# Altium PCB MAKKI_ISMAIL_ESPS3_CAM.PcbDoc
Units mil, origin at the board's own origin, x right, y up, seen from the top; angles counter-clockwise.
Board outline 2453.02 x 2250 mil, 2 copper layers (Top, Bottom); 77 components, 63 nets, 296 pads, 133 vias.
Unrouted connection lines stored in the file: 21.
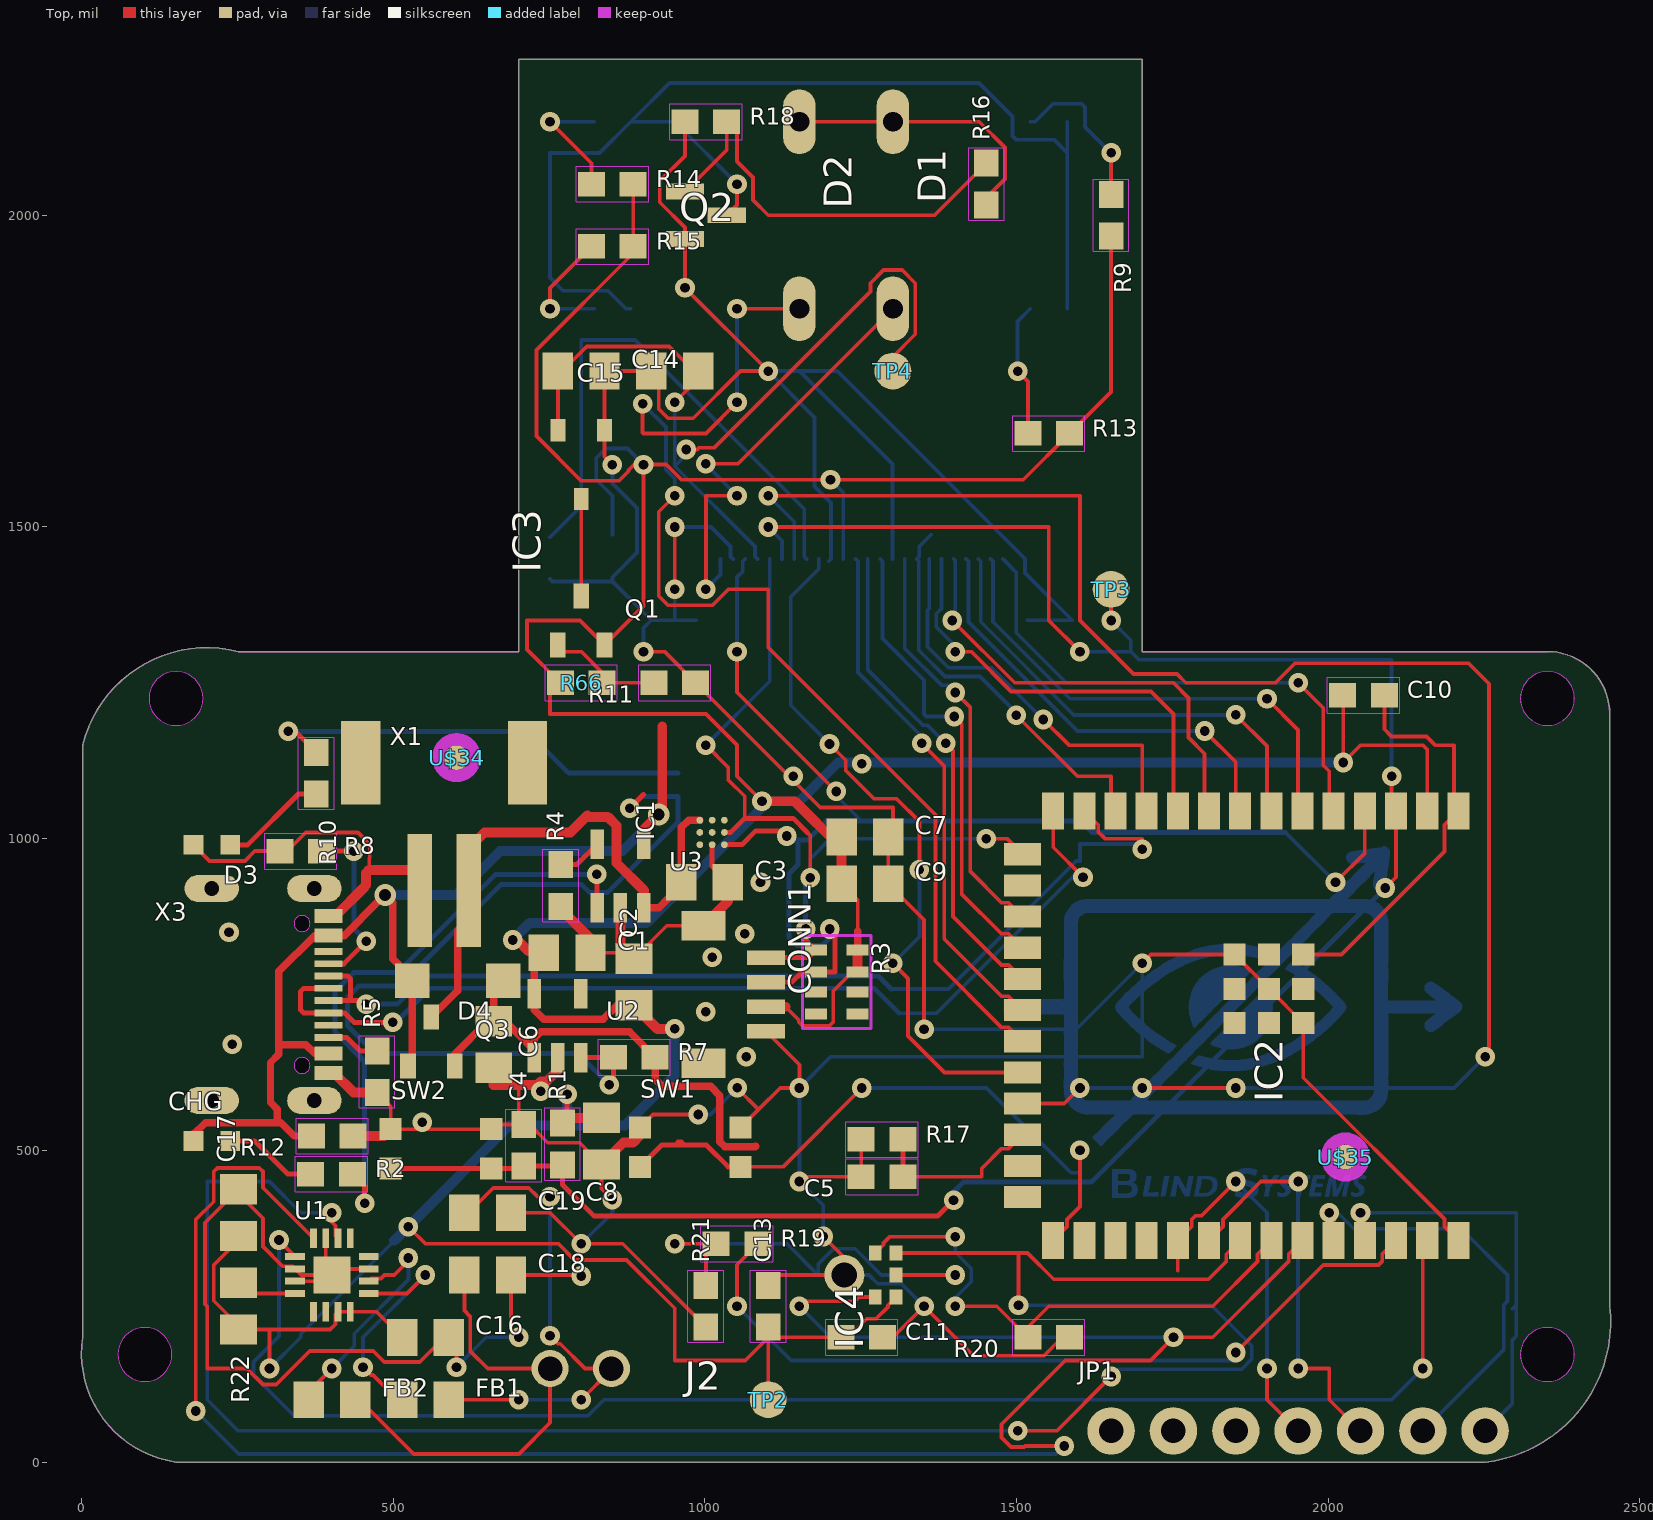
[diagram p0: Top view]
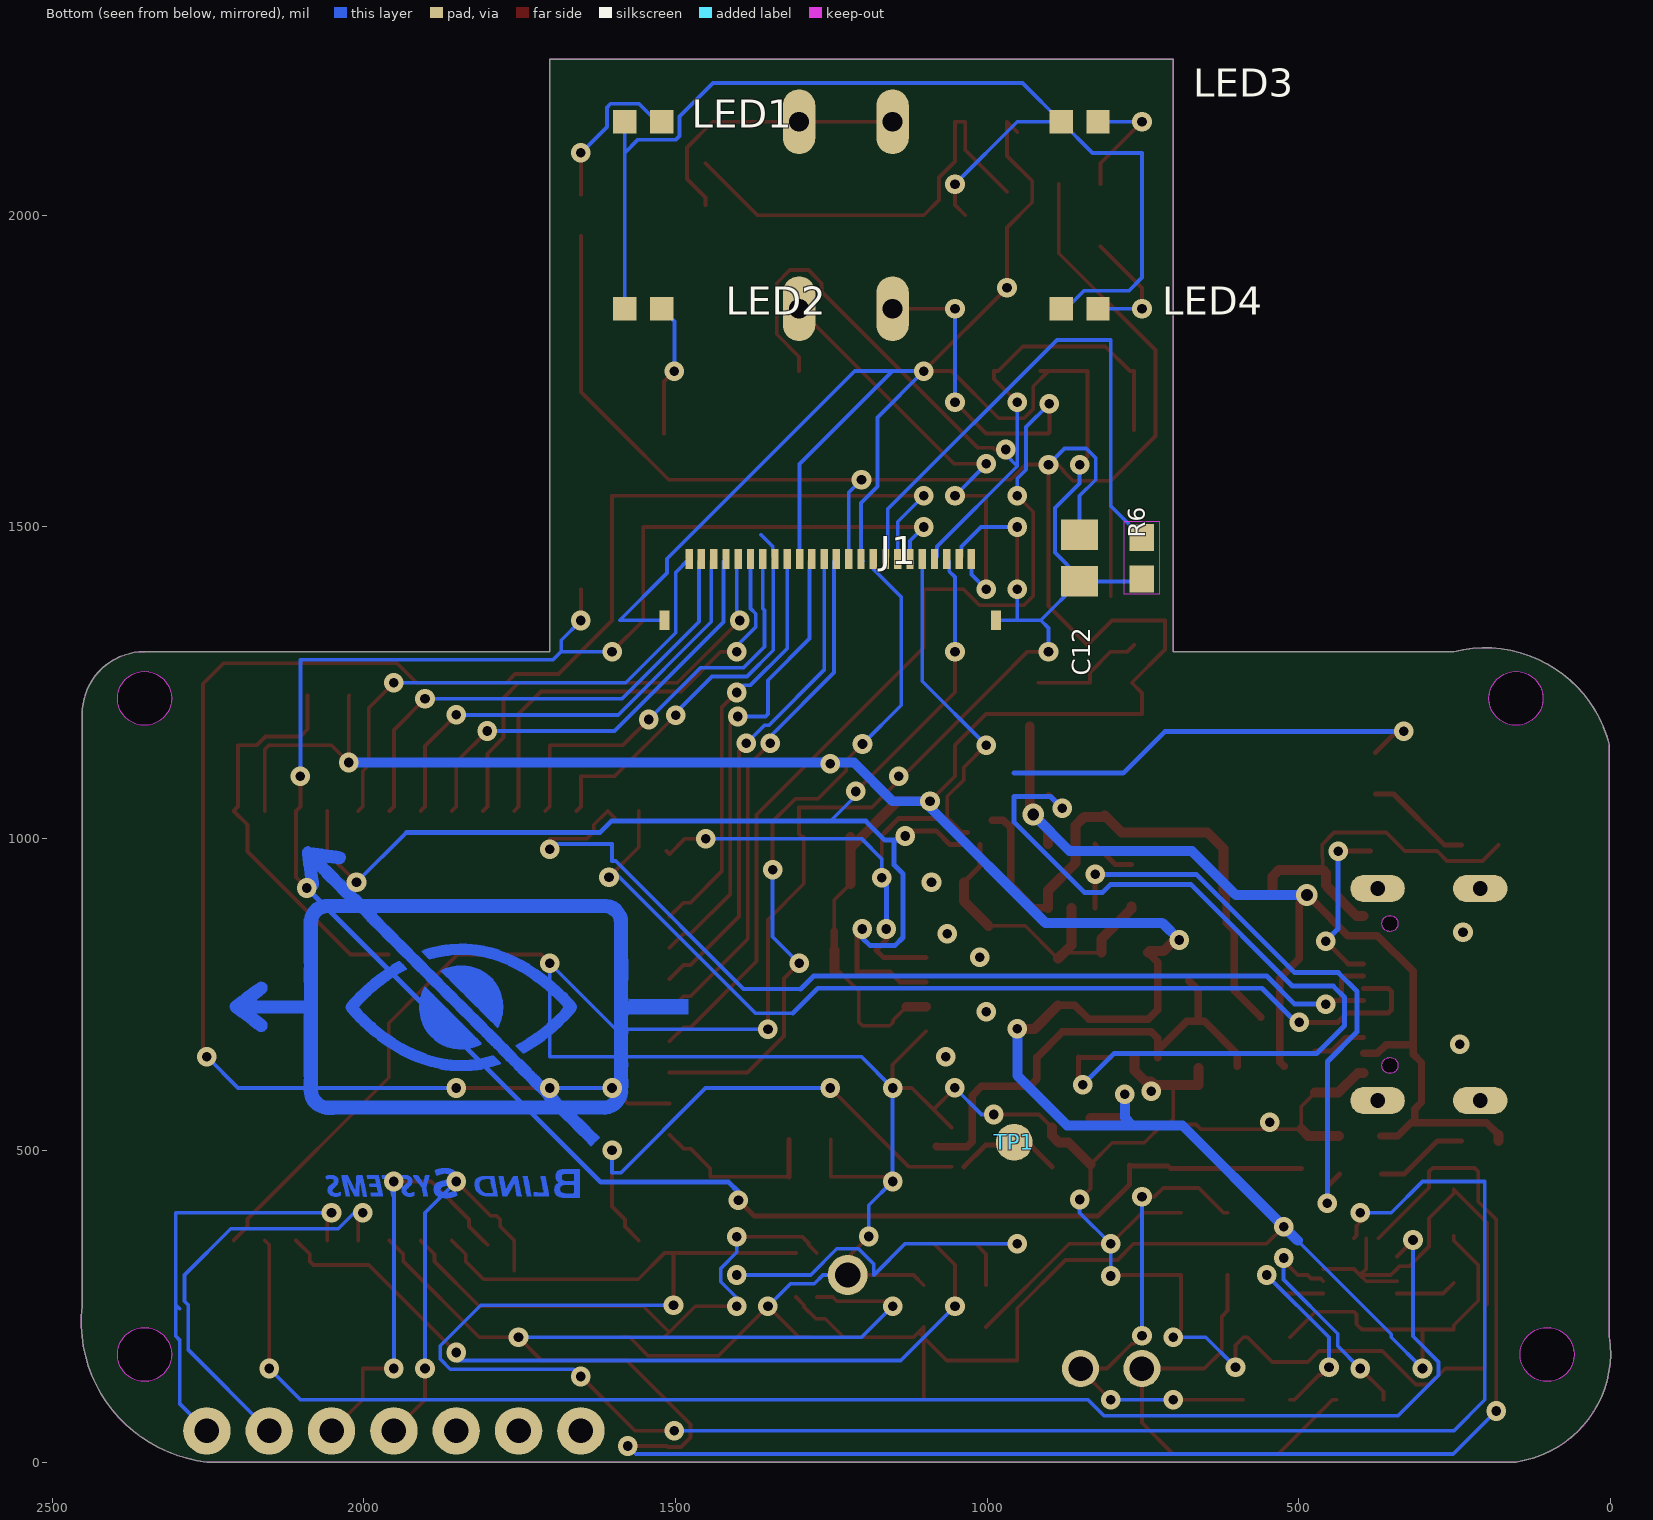
[diagram p1: Bottom view, seen from below]

## Layer stack, top to bottom
Top Solder: solder mask 0.4, Solder Resist, Dk 3.5
Top: signal copper 1.378
Dielectric 1: dielectric 12.6, FR-4, Dk 4.8
Bottom: signal copper 1.378
Bottom Solder: solder mask 0.4, Solder Resist, Dk 3.5

## Board outline
1701.78,2250 1701.78,1300 2351.78,1300 cw(c2351.78,1200) 2451.78,1200 2451.78,250 cw(c2226.78,225) 2251.78,0 151.78,0 cw(c176.78,175) 1.78,200 1.78,1150 cw(c201.78,1100) 251.78,1300 701.78,1300 701.78,2250
cut-out: 101.78,129.19 ccw(c101.78,172.5) 145.08,172.5 ccw(c101.78,172.5) 101.78,215.81 ccw(c101.78,172.5) 58.47,172.5 ccw(c101.78,172.5)
cut-out: 151.78,1181.69 ccw(c151.78,1225) 195.08,1225 ccw(c151.78,1225) 151.78,1268.31 ccw(c151.78,1225) 108.47,1225 ccw(c151.78,1225)
cut-out: 2351.78,129.19 ccw(c2351.78,172.5) 2395.08,172.5 ccw(c2351.78,172.5) 2351.78,215.81 ccw(c2351.78,172.5) 2308.47,172.5 ccw(c2351.78,172.5)
cut-out: 2351.78,1181.69 ccw(c2351.78,1225) 2395.08,1225 ccw(c2351.78,1225) 2351.78,1268.31 ccw(c2351.78,1225) 2308.47,1225 ccw(c2351.78,1225)
cut-out: 354.02,850.99 ccw(c354.02,863.78) 366.81,863.78 ccw(c354.02,863.78) 354.02,876.58 ccw(c354.02,863.78) 341.22,863.78 ccw(c354.02,863.78)
cut-out: 354.02,623.42 ccw(c354.02,636.22) 366.81,636.22 ccw(c354.02,636.22) 354.02,649.01 ccw(c354.02,636.22) 341.22,636.22 ccw(c354.02,636.22)

## Design rules (kind name [scope] priority, off if disabled: settings)
BoardOutlineClearance mdCopperDimension [All] p1: gap=10 ignorepadtopadclearanceinfootprint=FALSE except(0: Arc-SplitContinuation Track-SplitContinuation SMDPad-SplitContinuation THPad-SplitContinuation Via-SplitContinuation Fill-SplitContinuation Poly-SplitContinuation Region-SplitContinuation Text-SplitContinuation)
Clearance "Clearance (Same Net)" [All] p1: gap=8 ignorepadtopadclearanceinfootprint=FALSE except(7: SMDPad-SMDPad SMDPad-THPad SMDPad-Via)
Clearance [All] p2: gap=8 ignorepadtopadclearanceinfootprint=FALSE except(7: Track-THPad Track-Via THPad-THPad THPad-Via Via-Via)
HoleSize HoleSize_For_NetClass_Power [InNetClass('Power')] p1: absolutevalues=TRUE maxlimit=19 minlimit=19 maxpercent=80.000 minpercent=20.000
HoleSize HoleSize_For_NetClass_gnd [InNetClass('gnd')] p2: absolutevalues=TRUE maxlimit=19 minlimit=19 maxpercent=80.000 minpercent=20.000
HoleSize [All] p3: absolutevalues=TRUE maxlimit=100000 minlimit=15.5 maxpercent=80.000 minpercent=20.000
HoleToHoleClearance mdDrill [All] p1: gap=8 allowstackedmicrovias=TRUE
MinimumSolderMaskSliver [All] p1 off: minsoldermaskwidth=10
PasteMaskExpansion Expansion_SMDPaste_OFF [InPadClass('SMDPaste_OFF')] p1: expansion=0
PasteMaskExpansion mlMinCreamFrame [All] p2: expansion=0
PolygonConnect ThermalVias [IsVia] p1: connectstyle=Direct reliefconductorwidth=10 reliefentries=4 polygonreliefangle="90 Angle" airgapwidth=10
PolygonConnect [All] p2: connectstyle=Relief reliefconductorwidth=10 reliefentries=4 polygonreliefangle="90 Angle" airgapwidth=10
RoutingVias [All] p1: holewidth=15.5 width=31.5 viastyle="Through Hole" minholewidth=15.5 minwidth=31.5 maxholewidth=100 maxwidth=100
SolderMaskExpansion Expansion_SMDSolder_OFF [InPadClass('SMDSolder_OFF')] p1: expansion=0 istentingtop=FALSE
SolderMaskExpansion mlMinStopFrame [All] p2: expansion=2 istentingtop=FALSE
Width Width_For_NetClass_Power [InNetClass('Power')] p1: maxlimit=24 minlimit=10 preferedwidth=12
Width Width_For_NetClass_gnd [InNetClass('gnd')] p2: maxlimit=10 minlimit=10 preferedwidth=10
Width [All] p3: maxlimit=10 minlimit=6 preferedwidth=6
26 further rules are at their usual default settings.

## Classes and differential pairs
pad class SMDSolder_OFF: U1-1 U1-2 U1-3 U1-4 U1-5 U1-6 U1-7 U1-8 U1-9 U1-10 U1-11 U1-12 U1-13 U1-14 U1-15 U1-16
pad class SMDPaste_OFF: TP1-P$1 TP2-P$1 TP3-P$1 TP4-P$1 U1-THERMAL U$34-1 U$35-1
net class Power: VBAT VBUS VHI

## Components (designator, comment, footprint, x,y, rotation, side; value= is the part's Value field where it differs from the comment)
C1 "10uF" 0805-NO 779.28,817 r0 top
C2 "10uF" 0805-NO 886.28,770 r90 top
C3 "10µF" 0805-NO 999.78,930 r0 top
C4 "1uF" 0603-NO 709.78,508 r90 top
C5 "1uF" 0603-NO 1284.28,457.5 r180 top
C6 "10µF" 0805-NO 661.35,669.8 r270 top
C7 "10uF" 0805-NO 1256.78,1002.5 r0 top
C8 "10µF" 0805-NO 834.37,514.64 r270 top
C9 "10uF" 0805-NO 1256.78,927.5 r0 top
C10 "1uF" 0603-NO 2056.78,1230 r0 top
C11 "0.1uF" 0603-NO 1251.78,200 r0 top
C12 "100pF" 0805-NO 851.78,1450 r270 bottom
C13 "1uF" 0603-NO 1101.78,250 r90 top
C14 "10µF" 0805-NO 801.78,1750 r0 top
C15 "100pF" 0805-NO 951.78,1750 r180 top
C16 "0.1uF" 0805-NO 551.78,200 r0 top
C17 "10uF" 0805-NO 251.78,400 r90 top
C18 "220pF" 0805-NO 651.78,300 r0 top
C19 "220pF" 0805-NO 651.78,400 r0 top
CHG "ORANGE" CHIPLED_0603_NOOUTLINE 209.28,515 r270 top
CONN1 "JST SH" JST_SH4_RA 1031.78,750 r270 top
D1 "1N4148DO35-7" DO35-7 1301.78,2000 r270 top
D2 "1N4148DO35-7" DO35-7 1151.78,2000 r270 top
D3 "RED" CHIPLED_0603_NOOUTLINE 209.28,990 r90 top
D4 "MBR540" SOD-123 603.78,772 r180 top
FB1 "Ferrite" 0805-NO 551.78,100 r0 top
FB2 "Ferrite" 0805-NO 401.78,100 r0 top
IC1 "LC709203F/MH" WLCSP9 1011.78,1010 r90 top
IC2 "ESP32-S3-WROOM-1-N16R8" ESP32S3WROOM1N16R8 2001.78,700 r270 top
IC3 "XC6206P282MR-G" SOT95P280X130-3N 801.78,1600 r270 top
IC4 "" SPH0645LM4H 1251.78,300 r270 top
J1 "2-2328702-4" 223287024 1251.78,1400 r180 bottom
J2 "B2B-XH-A" B2B-XH-A 751.78,150 r0 top
JP1 "" 1X07_ROUND_76 1951.78,50 r0 top
LED1 "150060SS75000" LEDC1608X80N 1551.78,2150 r180 bottom
LED2 "150060SS75000" LEDC1608X80N 1551.78,1850 r180 bottom
LED3 "150060SS75000" LEDC1608X80N 851.78,2150 r180 bottom
LED4 "150060SS75000" LEDC1608X80N 851.78,1850 r180 bottom
Q1 "DMG3415U" SOT23-R 801.78,1350 r0 top
Q2 "2N7002" SOT96P240X120-3N 1001.78,2000 r0 top
Q3 "DMG3415U" SOT23-R 561.28,674.5 r0 top
R1 "5.1K" 0603-NO 771.78,510 r90 top
R2 "5.1K" 0603-NO 401.28,462 r0 top
R3 "10K" RESPACK_4X0603 1211.78,770 r270 top
R4 "5.1K" 0603-NO 768.78,925 r90 top
R5 "5.1K" 0603-NO 474.28,626 r90 top
R6 "1K" 0603-NO 751.78,1450 r90 bottom
R7 "100K" 0603-NO 886.78,649.5 r0 top
R8 "5.1K" 0603-NO 351.78,980 r0 top
R9 "0.12 K" 0603-NO 1651.78,2000 r270 top
R10 "5.1K" 0603-NO 376.78,1105 r270 top
R11 "1K" 0603-NO 951.78,1250 r180 top
R12 "100K" 0603-NO 402.28,523 r180 top
R13 "0.12 K" 0603-NO 1551.78,1650 r0 top
R14 "0.12 K" 0603-NO 851.78,2050 r0 top
R15 "0.12 K" 0603-NO 851.78,1950 r0 top
R16 "1K" 0603-NO 1451.78,2050 r90 top
R17 "1Meg" 0603-NO 1284.28,517.5 r0 top
R18 "1K" 0603-NO 1001.78,2150 r0 top
R19 "68" 0603-NO 1051.78,350 r0 top
R20 "47K" 0603-NO 1551.78,200 r180 top
R21 "47K" 0603-NO 1001.78,250 r90 top
R22 "1M" 0805-NO 251.78,250 r270 top
R66 "10K" 0603-NO 801.78,1250 r180 top
SW1 "KMR2" BTN_KMR2_4.6X2.8 976.78,505 r0 top
SW2 "KMR2" BTN_KMR2_4.6X2.8 576.78,502.5 r0 top
TP1 "" TESTPOINT_ROUND_1.5MM_NO 956.78,513 r180 bottom
TP2 "" TESTPOINT_ROUND_1.5MM_NO 1101.78,100 r0 top
TP3 "" TESTPOINT_ROUND_1.5MM_NO 1651.78,1400 r0 top
TP4 "" TESTPOINT_ROUND_1.5MM_NO 1301.78,1750 r0 top
U1 "MAX98357A" QFN16_3MM 401.78,300 r0 top
U2 "AP2112/RT9080-3.3" SOT23-5 763.78,700 r0 top
U3 "MCP73831T-2ACI/OT" SOT23-5 864.78,940 r0 top
U$34 "" FIDUCIAL_1MM 601.78,1130 r270 top
U$35 "" FIDUCIAL_1MM 2027.64,489.28 r270 top
X1 "JSTPH" JSTPH2_BATT 581.78,1062.5 r0 top
X3 "USB C" USB_C_CUSB31-CFM2AX-01-X 256.78,750 r270 top

## Footprints (in the part's own frame and the unit in brackets; to place one, negate y for a bottom-side part, rotate by r counter-clockwise, add the part's x,y. Pads: shape width x height; smd on the part's side, far side on the other; paste and mask are expansions set on the pad)
1X07_ROUND_76 [mil] "1X07_ROUND_76"
  round 76 hole 39.37: 1(-300,0) 2(-200,0) 3(-100,0) 4(0,0) 5(100,0) 6(200,0) 7(300,0)
  body extent -354,-38 338,38, height 150
0603-NO [mm] "0603-NO"
  rect 1.1x1 smd: 1(-0.85,0) 2(0.85,0)
  Top keep-out lines w0.051: -1.473,0.729 -1.473,-0.729 1.473,-0.729 1.473,0.729 -1.473,0.729
  body extent -1.5,-0.76 1.5,0.76, height 3.81
0805-NO [mil] "0805-NO"
  rect 48.82x59.06 smd: 1(-37.4,0) 2(37.4,0)
  body extent -62,-30 62,30, height 150
223287024 [mil] "223287024"
  rect 11.81x31.5 smd: 1(226.38,48.62) 2(206.69,48.62) 3(187.01,48.62) 4(167.32,48.62) 5(147.64,48.62) 6(127.95,48.62) 7(108.27,48.62) 8(88.58,48.62) 9(68.9,48.62) 10(49.21,48.62) 11(29.53,48.62) 12(9.84,48.62) 13(-9.84,48.62) 14(-29.53,48.62) 15(-49.21,48.62) 16(-68.9,48.62) 17(-88.58,48.62) 18(-108.27,48.62) 19(-127.95,48.62) 20(-147.64,48.62) 21(-167.32,48.62) 22(-187.01,48.62) 23(-206.69,48.62) 24(-226.38,48.62)
  rect 15.75x31.5 smd: 25(-265.75,-49.8) 26(265.75,-49.8)
  body extent -274,-66 274,64, height 50
B2B-XH-A [mm] "B2B-XH-A"
  round 1.508 hole 1: 1(0,0) 2(2.5,0)
  body extent -0.76,-0.76 3.26,0.76, height 1.27
BTN_KMR2_4.6X2.8 [mil] "BTN_KMR2_4.6X2.8"
  rect 35.43x35.43 smd: A(80.71,31.5) A'(-80.71,31.5) B(80.71,-31.5) B'(-80.71,-31.5)
  body extent -98,-59 98,59, height 150
CHIPLED_0603_NOOUTLINE [mil] "CHIPLED_0603_NOOUTLINE"
  rect 31.5x31.5 smd: A(0,-29.53) C(0,29.53)
  body extent -18,-45 18,45, height 150
DO35-7 [mil] "DO35-7"
  oval 104x52 hole 32: A(150,0) C(-150,0)
  body extent -202,-26 202,26, height 150
ESP32S3WROOM1N16R8 [mm] "ESP32S3WROOM1N16R8"
  rect 1.5x0.9 smd: 1(-8.75,5.26) 2(-8.75,3.99) 3(-8.75,2.72) 4(-8.75,1.45) 5(-8.75,0.18) 6(-8.75,-1.09) 7(-8.75,-2.36) 8(-8.75,-3.63) 9(-8.75,-4.9) 10(-8.75,-6.17) 11(-8.75,-7.44) 12(-8.75,-8.71) 13(-8.75,-9.98) 14(-8.75,-11.25) 27(8.75,-11.25) 28(8.75,-9.98) 29(8.75,-8.71) 30(8.75,-7.44) 31(8.75,-6.17) 32(8.75,-4.9) 33(8.75,-3.63) 34(8.75,-2.36) 35(8.75,-1.09) 36(8.75,0.18) 37(8.75,1.45) 38(8.75,2.72) 39(8.75,3.99) 40(8.75,5.26)
  rect 0.9x1.5 smd: 15(-6.985,-12.5) 16(-5.715,-12.5) 17(-4.445,-12.5) 18(-3.175,-12.5) 19(-1.905,-12.5) 20(-0.635,-12.5) 21(0.635,-12.5) 22(1.905,-12.5) 23(3.175,-12.5) 24(4.445,-12.5) 25(5.715,-12.5) 26(6.985,-12.5)
  rect 0.9x0.9 smd: 41(-1.5,-2.46) 42(-2.9,-1.06) 43(-2.9,-2.46) 44(-2.9,-3.86) 45(-1.5,-3.86) 46(-0.1,-3.86) 47(-0.1,-2.46) 48(-0.1,-1.06) 49(-1.5,-1.06)
  body extent -10.55,-14.3 10.55,13.8, height 3.81
FIDUCIAL_1MM [mm] "FIDUCIAL_1MM"
  rrect100% 1x1 smd paste+0: 1(0,0)
  Top keep-out lines w0.483: 0,-0.75 cw(c0,0) -0.75,0 cw(c0,0) 0,0.75 cw(c0,0) 0.75,0 cw(c0,0) 0,-0.75
  Top keep-out lines w0.5: 0,-0.75 cw(c0,0) -0.75,0 cw(c0,0) 0,0.75 cw(c0,0) 0.75,0 cw(c0,0) 0,-0.75
  body extent -1.01,-1.01 1.01,1.01, height 3.81
JST_SH4_RA [mil] "JST_SH4_RA"
  rect 23.62x61.02 smd: 1(59.06,66.38) 2(19.69,66.38) 3(-19.69,66.38) 4(-59.06,66.38)
  rect 47.24x70.87 smd: MT1(-110.24,-33.94) MT2(110.24,-33.94)
  body extent -134,-69 134,97, height 150
JSTPH2_BATT [mm] "JSTPH2_BATT"
  rect 1x4.6 smd: 1(-1,-3.7) 2(1,-3.7)
  rect 1.6x3.4 smd: NC1(-3.4,1.5) NC2(3.4,1.5)
  body extent -4.2,-6 4.2,3.2, height 3.81
LEDC1608X80N [mil] "LEDC1608X80N"
  rect 37.4x37.4 smd: 1(-29.53,0) 2(29.53,0)
  body extent -48,-19 48,19, height 50
QFN16_3MM [mil] "QFN16_3MM"
  rect 31.5x11.02 smd mask+0: 1(-59.06,29.53) 2(-59.06,9.84) 3(-59.06,-9.84) 4(-59.06,-29.53) 9(59.06,-29.53) 10(59.06,-9.84) 11(59.06,9.84) 12(59.06,29.53)
  rect 11.02x31.5 smd mask+0: 5(-29.53,-59.06) 6(-9.84,-59.06) 7(9.84,-59.06) 8(29.53,-59.06) 13(29.53,59.06) 14(9.84,59.06) 15(-9.84,59.06) 16(-29.53,59.06)
  rect 59.06x59.06 smd paste+0: THERMAL(0,0)
  body extent -76,-76 76,76, height 150
RESPACK_4X0603 [mil] "RESPACK_4X0603"
  rect 17.72x35.43 smd: 1(-51.18,-33.46) 2(-15.75,-33.46) 3(15.75,-33.46) 4(51.18,-33.46) 5(51.18,33.46) 6(15.75,33.46) 7(-15.75,33.46) 8(-51.18,33.46)
  Top keep-out lines w5: 74.8,-55.12 -74.8,-55.12 -74.8,55.12 74.8,55.12 74.8,-55.12
  body extent -78,-58 78,58, height 150
SOD-123 [mil] "SOD-123"
  rect 55.12x55.12 smd: A(72.83,0) C(-72.83,0)
  body extent -100,-32 100,32, height 150
SOT23-5 [mil] "SOT23-5"
  rect 21.65x47.24 smd: 1(-37.4,-51.19) 2(0,-51.19) 3(37.4,-51.19) 4(37.4,51.19) 5(-37.4,51.19)
  body extent -60,-75 60,75, height 150
SOT23-R [mil] "SOT23-R"
  rect 25x40 smd: 1(-37.4,-39.37) 2(37.4,-39.37) 3(0,39.37)
  body extent -66,-59 66,59, height 150
SOT95P280X130-3N [mil] "SOT95P280X130-3N"
  rect 35.43x23.62 smd: 1(-55.12,37.4) 2(-55.12,-37.4) 3(55.12,0)
  body extent -84,-72 84,72, height 150
SOT96P240X120-3N [mm] "SOT96P240X120-3N"
  rect 1.55x0.65 smd: 1(-0.85,0.96) 2(-0.85,-0.96) 3(0.85,0)
  body extent -1.9,-1.78 1.9,1.78, height 3.81
SPH0645LM4H [mm] "SPH0645LM4H"
  rect 0.6x0.525 smd: 1(-0.9,1.4) 2(-0.9,0.55) 4(0.9,0.55) 5(0.9,1.4) 6(0,1.4)
  round 1.625 hole 1.025: 3(0,-0.71)
  body extent -1.2,-1.53 1.2,1.66, height 3.81
TESTPOINT_ROUND_1.5MM_NO [mil] "TESTPOINT_ROUND_1.5MM_NO"
  rrect100% 59.06x59.06 smd paste+0: P$1(0,0)
  body extent -30,-30 30,30, height 50
USB_C_CUSB31-CFM2AX-01-X [mil] "USB_C_CUSB31-CFM2AX-01-X"
  rect 22.64x45.28 smd: A1B12(-125.98,139.57) A4B9(-94.49,139.57) B1A12(125.98,139.57) B4A9(94.49,139.57)
  rect 10.83x45.28 smd: A5(-49.21,139.57) A6(-9.84,139.57) A7(9.84,139.57) A8(49.21,139.57) B5(68.9,139.57) B6(29.53,139.57) B7(-29.53,139.57) B8(-68.9,139.57)
  oval 43.62x87.24 hole 23.62: M1(-170.08,116.93) M2(170.08,116.93) M3(-170.08,-47.64) M4(170.08,-47.64)
  body extent -192,-151 192,162, height 150
WLCSP9 [mil] "WLCSP9"
  rrect100% 10.83x10.83 smd: A1(-19.69,19.69) A2(0,19.69) A3(19.69,19.69) B1(-19.69,0) B2(0,0) B3(19.69,0) C1(-19.69,-19.69) C2(0,-19.69) C3(19.69,-19.69)
  body extent -26,-26 26,26, height 50

## Part data
C1 C2 C3 C6 C7 C8 C9 C12 C14 C15 C16 C17 C18 C19 FB1 FB2 R22: library part 0805-NO, PackageName=0805-NO
C4 C5 C10 C11 C13 R1 R2 R4 R5 R6 R7 R8 R9 R10 R11 R12 R13 R14 R15 R16 R17 R18 R19 R20 R21 R66: library part 0603-NO, PackageName=0603-NO
CHG D3: library part CHIPLED_0603_NOOUTLINE, PackageName=CHIPLED_0603_NOOUTLINE
CONN1: library part JST_SH4_RA, PackageName=JST_SH4_RA
D1 D2: library part DO35-7, PackageName=DO35-7
D4: library part SOD-123, PackageName=SOD-123
IC1: library part WLCSP9, PackageName=WLCSP9
IC2: library part ESP32S3WROOM1N16R8, PackageName=ESP32S3WROOM1N16R8
IC3: library part SOT95P280X130-3N, PackageName=SOT95P280X130-3N
IC4: library part SPH0645LM4H, PackageName=SPH0645LM4H
J1: library part 223287024, PackageName=223287024
JP1: library part 1X07_ROUND_76, PackageName=1X07_ROUND_76
LED1 LED2 LED3 LED4: library part LEDC1608X80N, PackageName=LEDC1608X80N
Q1 Q3: library part SOT23-R, PackageName=SOT23-R
Q2: library part SOT96P240X120-3N, PackageName=SOT96P240X120-3N
R3: library part RESPACK_4X0603, PackageName=RESPACK_4X0603
SW1 SW2: library part BTN_KMR2_4.6X2.8, PackageName=BTN_KMR2_4.6X2.8
TP1 TP2 TP3 TP4: library part TESTPOINT_ROUND_1.5MM_NO, PackageName=TESTPOINT_ROUND_1.5MM_NO
U1: library part QFN16_3MM, PackageName=QFN16_3MM
U2 U3: library part SOT23-5, PackageName=SOT23-5
U$34 U$35: library part FIDUCIAL_1MM, PackageName=FIDUCIAL_1MM
X1: library part JSTPH2_BATT, PackageName=JSTPH2_BATT
X3: library part USB_C_CUSB31-CFM2AX-01-X, PackageName=USB_C_CUSB31-CFM2AX-01-X
J2: PackageName=B2B-XH-A

## Free pads (board coordinates)
  round 25.59 hole 25.59 unplated: MH1(354.02,636.22) MH2(354.02,863.78)
  round 86.61 hole 86.61 unplated: MH1(2351.78,172.5) MH2(2351.78,1225) MH3(101.78,172.5) MH4(151.78,1225)

## Via types
v1: diameter 31.5/31.5 (per signal layer), hole 15.5, Top to Bottom, 131 vias
v2: diameter 35/35 (per signal layer), hole 19, Top to Bottom, 2 vias

## Nets (pads, with @x,y where several pads share a name; then routed paths per layer and width w, separated by ;. In a path a pad name is that pad's centre, name@x,y a point inside that pad or via, vN(x,y) a via of type N, cw(c..) or ccw(c..) an arc to the next point about the centre after c; other vN are vias at no path point)
1.8V: IC2.25
2.8V: C14.1 C15.1 IC3.2 J1.4 TP4.P$1 | length 1417.9
  Top w6: IC3.2 C14.1 771.1,1750 810.63,1789.53 942.93,1789.53 982.46,1750 C15.1 989.18,1737.4 v1(951.78,1700) ; v1(970.08,1624.25) 988.11,1624.25 991.11,1627.25 1015.45,1627.25 1265.78,1877.58 1265.78,1890.91 1286.87,1912 1316.69,1912 1337.78,1890.91 1337.78,1809.09 1301.78,1773.09 TP4.P$1
  Bottom w6: v1(951.78,1700) 951.78,1597.41 ; v1(970.08,1624.25) 970.08,1615.71 951.78,1597.41 ; J1.4 1080.68,1452.4 1080.68,1468.51 951.78,1597.41
3.3V: C1.1 C2.1 C7.1 C8.1 C9.1 C10.1 C11.1 C12.1 C13.1 C16.1 C17.1 CONN1.2 IC2.2 IC4.5 J1.11 Q1.2 R1.2 R3.7 R3.8 R9.2 R13.2 R14.2 R15.2 R22.2 R66.2 TP2.P$1 U1.7 U1.8 U2.5 | length 8811.1
  Top w6: C17.1 251.78,355.48 212.25,315.95 212.25,258.85 251.78,219.32 R22.2 301.78,212.6 ; v1(301.78,150) 301.78,212.6 ; C16.1 473.43,240.94 U1.8 U1.7 407.45,236.77 407.45,221.05 398.99,212.6 301.78,212.6 ; v1(524.28,377.5) 551.78,350 765.36,350 791.11,324.25 874.27,324.25 951.78,246.74 951.78,163 1064.78,163 C13.1@1110.05,208.27 ; R14.2 R15.2 885.24,1938.95 729.97,1783.67 729.97,1645.86 801.58,1574.25 862.45,1574.25 877.53,1589.33 877.53,1590.83 886.7,1600 v1(901.78,1600) ; v1(1091.78,1060) 1051.78,1100 1051.78,1150 1001.78,1200 751.78,1200 751.78,1233.46 R66.2 714.78,1303.54 714.78,1350 799.81,1350 Q1.2 901.78,1373.23 v1(901.78,1600) ; TP2.P$1 C13.1 C13.1@1110.05,208.27 ; 1129.38,730.32 1150.6,709.09 1150.6,705.82 1156.46,699.96 1200.17,699.96 1206.03,705.82 1206.03,755.76 1236.02,785.75 R3.7 ; C9.1 1245.24,901.63 1245.24,850 ; IC4.5 1293.77,251.44 1293.77,248.61 1274.84,229.69 1259.94,229.69 1230.26,200 C11.1 1118.32,200 C13.1@1110.05,208.27 ; R9.2 1651.78,1716.54 R13.2 1510.99,1575.75 v1(1201.78,1575.75) 962.45,1575.75 938.2,1600 v1(901.78,1600) ; C10.1 2024.28,1229.04 v1(2024.28,1122.16) 2052.12,1150 2151.78,1150 2158.87,1142.91 IC2.2
  Top w8: R1.2 779.28,550.96 v1(779.28,590)
  Top w12: C1.1 726.38,801.5 U2.5 726.38,725.4 741.78,710 836.78,710 859.38,732.6 C2.1 ; R3.8 1245.24,850 1245.24,851.54
  Top w16: v1(691.78,837.5) 699.28,837.5 717.28,819.5 739.38,819.5 C1.1 ; R1.2 780.35,552.04 C8.1 ; C2.1 923.88,695 v1(951.78,695) ; v1(1091.78,1060) 1144.28,1060 1217.82,986.46 1219.38,981.47 C9.1 C7.1 ; CONN1.2 1129.38,730.32 ; R3.7 R3.8 ; v1(2024.28,1122.16) v1@2025.85,1122.16
  Bottom w6: v1(301.78,150) 351.78,200 351.78,205 501.78,355 ; C12.1 851.78,1550 826.03,1575.75 826.03,1610.67 841.11,1625.75 876.03,1625.75 v1(901.78,1600) ; v1(1201.78,1575.75) 1222.25,1555.28 J1.11
  Bottom w8: v1@1091.78,1050 v1(1091.78,1060)
  Bottom w16: 501.78,355 v1(524.28,377.5) 686.78,540 766.78,540 ; v1(691.78,837.5) 719.28,865 906.78,865 v1@1091.78,1050 ; v1(779.28,590) 779.28,552.5 766.78,540 ; v1(951.78,695) 951.78,620 871.78,540 766.78,540 ; v1(1091.78,1060) 1151.78,1060 1213.94,1122.16 v1(2024.28,1122.16)
BCLK: IC2.35 IC4.4 U1.16 | length 3536.2
  Top w6: v1(183.57,81.79) 183.57,388.99 212.25,417.67 212.25,465.95 218.11,471.81 285.45,471.81 291.31,465.95 291.31,440 U1.16 ; v1(1151.78,250) 1159.79,258.01 1241.22,258.01 1247.77,264.57 IC4.4 ; v1(1576.7,25.75) 1513.95,25.75 1512.45,24.25 1491.11,24.25 1476.03,39.33 1476.03,60.67 1578.36,163 1714.78,163 v1(1751.78,200) 1814.74,200 1936.58,321.84 1936.58,333.23 IC2.35
  Bottom w6: v1(183.57,81.79) 252.26,13.1 252.8,13 1563.95,13 v1(1576.7,25.75) ; v1(1151.78,250) 1201.78,200 v1(1751.78,200)
BOOT0: IC2.27 SW1.B SW1.B' TP1.P$1 | length 1033.8
  Top w6: SW1.B 1125.28,473.5 v1(1251.78,600) ; IC2.27 1581.15,377.8 1581.15,389.18 1601.78,409.81 v1(1601.78,500)
  Top w8: SW1.B' 931.07,508.5 966.78,508.5 ; 956.78,513 962.28,513 966.78,508.5 ; 1037.49,473.5 1002.49,508.5 966.78,508.5
  Bottom w6: v1(1251.78,600) 1451.78,600 1587.94,463.84 1601.78,463.84 v1(1601.78,500)
COMMAND: D2.A IC2.21 | length 1902.7
  Top w6: v1(900.28,1697.72) 900.28,1651.5 901.78,1650 1001.78,1650 v1(1051.78,1700) ; v1(951.78,1550) 926.03,1524.25 926.03,1389.33 941.11,1374.25 1012.45,1374.25 1038.2,1400 1101.78,1400 1101.78,1306.42 1370.03,1038.17 1370.03,803.24 1475.98,697.28 1487.37,697.28 IC2.21 ; v1(1051.78,1850) D2.A
  Bottom w6: v1(900.28,1697.72) 937.78,1660.22 937.78,1591.61 951.78,1577.61 v1(951.78,1550) ; v1(1051.78,1700) v1(1051.78,1850)
D0: IC2.5 J1.24 | length 841.8
  Top w6: v1(1951.78,1250) 1992.15,1209.63 1992.15,1117.87 2001.78,1108.24 2001.78,1100 2001.78,1084.02 2001.78,1051.57 IC2.5
  Bottom w6: J1.24 1499.65,1427.13 1499.65,1330.31 1579.96,1250 v1(1951.78,1250)
D1: IC2.6 J1.23 | length 796.4
  Top w6: v1(1901.78,1224.25) 1951.78,1174.25 1951.78,1051.57 IC2.6
  Bottom w6: J1.23 1462.25,1444.84 1462.25,1347.91 1585.91,1224.25 v1(1901.78,1224.25)
D2: IC2.10 J1.19 | length 714.5
  Top w6: v1(1401.78,1300) 1427.33,1300 1491.33,1236 1715.78,1236 1751.78,1200 1751.78,1051.57 IC2.10
  Bottom w6: J1.19 1379.73,1369.02 1371.38,1360.67 1371.38,1339.33 1401.78,1308.94 v1(1401.78,1300)
D3: IC2.8 J1.21 | length 705.8
  Top w6: v1(1801.78,1172.75) 1851.78,1122.75 1851.78,1051.57 IC2.8
  Bottom w6: J1.21 1422.88,1444.84 1422.88,1347.68 1597.81,1172.75 v1(1801.78,1172.75)
D4: IC2.7 J1.22 | length 751.1
  Top w6: v1(1851.78,1198.5) 1901.78,1148.5 1901.78,1051.57 IC2.7
  Bottom w6: J1.22 1442.57,1444.84 1442.57,1347.79 1591.86,1198.5 v1(1851.78,1198.5)
D5: IC2.9 J1.20 | length 729.5
  Top w6: v1(1397.13,1350) 1497.13,1250 1751.78,1250 1776.03,1225.75 1776.03,1162.08 1801.78,1136.33 1801.78,1051.57 IC2.9
  Bottom w6: v1(1397.13,1350) 1401.78,1350 1401.78,1446.26 J1.20
D6: IC2.11 J1.18 | length 660
  Top w6: v1(1542.96,1191.18) 1584.15,1150 1701.78,1150 1701.78,1051.57 IC2.11
  Bottom w6: J1.18 1360.05,1369.13 1357.38,1366.47 1357.38,1307.98 1391.11,1274.25 1459.9,1274.25 v1(1542.96,1191.18)
D7: IC2.17 J1.16 | length 664.7
  Top w6: v1(1401.78,1234.5) 1426.03,1210.25 1426.03,947.24 1475.98,897.28 1487.37,897.28 IC2.17
  Bottom w6: J1.16 1320.68,1305.09 1379.52,1246.25 1390.03,1246.25 v1(1401.78,1234.5)
D8: IC2.18 J1.14 | length 750.9
  Top w6: v1(1400.28,1196) 1412.03,1184.25 1412.03,911.24 1475.98,847.28 1487.37,847.28 IC2.18
  Bottom w6: J1.14 1285.09,1444.84 1285.09,1320.88 1351.78,1254.19 1351.78,1200 1355.78,1196 v1(1400.28,1196)
D9: IC2.20 J1.12 | length 841.2
  Top w6: v1(1347.78,1152.91) 1384.03,1116.66 1384.03,839.24 1475.98,747.28 1487.37,747.28 IC2.20
  Bottom w6: J1.12 1245.72,1444.84 1245.72,1266.46 1347.78,1164.4 v1(1347.78,1152.91)
D13: R10.1 | length 711.8
  Top w8: v1(331.78,1172.16) 343.09,1172.16 R10.1
  Bottom w8: v1(331.78,1172.16) 714.62,1172.16 781.78,1105 956.78,1105
D+: IC2.14 X3.A6 X3.B6 | length 1609
  Top w6: IC2.14 1558.87,986.03 v1(1606.65,938.25)
  Top w8: X3.A6 356.62,759.84 351.78,755 351.78,725 356.31,720.47 X3.B6 422.1,720.47 437.17,705.39 v1(499.67,705.39)
  Bottom w6: 1311.78,720 1371.78,720 1601.78,950 1606.65,945.13 v1(1606.65,938.25)
  Bottom w8: v1(499.67,705.39) 504.67,705.39 559.28,760 1271.78,760 1311.78,720
D-: IC2.13 X3.A7 X3.B7 | length 1673.7
  Top w6: IC2.13@1597.47,1033.09 IC2.13 1631.15,1022.2 1631.15,1010.82 1641.97,1000 1701.78,1000 v1(1701.78,983.25)
  Top w8: X3.A7 431.78,740.16 ; X3.B7 427.25,779.53 431.78,775 431.78,740.16 ; v1(456.78,734.6) 451.22,740.16 431.78,740.16
  Bottom w6: 1299.28,758.84 1390.82,758.84 1595.98,964 1601.78,964 1601.78,991.38 1693.65,991.38 v1(1701.78,983.25)
  Bottom w8: v1(456.78,734.6) 506.78,734.6 551.78,779.6 1278.52,779.6 1299.28,758.84
DATA: IC2.38 R19.2 | length 1300.9
  Top w6: v1(1051.78,250) 1051.78,316.54 R19.2 ; v1(1851.78,175.75) 1992.01,315.98 2080.73,315.98 2086.58,321.84 2086.58,333.23 IC2.38
  Bottom w6: v1(1051.78,250) 1138.78,163 1851.78,163 v1(1851.78,175.75)
DIN: IC2.39 U1.1 | length 2413.7
  Top w6: v1(317.06,356.21) 317.06,355.19 U1.1 ; v1(2151.78,150) 2151.78,348.43 IC2.39
  Bottom w6: v1(317.06,356.21) 317.06,201.69 276.03,160.67 276.03,139.33 341.11,74.25 812.45,74.25 838.2,100 2101.78,100 v1(2151.78,150)
EN: R7.1 U2.3 | length 1419.2
  Top w8: U2.3 852.63,648.82 R7.1 853.32,611.54 v1(846.78,605) ; v1(879.51,1048.66) 901.78,1070.93
  Bottom w8: v1(846.78,605) 796.78,655 471.78,655 426.78,700 426.78,745.39 444.83,763.44 510.22,763.44 673.5,926.72 801.99,926.72 814.83,913.88 844.16,913.88 956.78,1026.5 956.78,1067.66 898.51,1067.66 v1(879.51,1048.66)
GND: C1.2 C2.2 C3.2 C4.2 C5.2 C6.2 C7.2 C8.2 C9.2 C10.2 C11.2 C12.2 C13.2 C14.2 C15.2 C16.2 C17.2 C18.2 C19.2 CONN1.1 CONN1.MT1 CONN1.MT2 D3.C IC1.A1 IC1.B1 IC2.1 IC2.40 IC2.41 IC2.42 IC2.43 IC2.44 IC2.45 IC2.46 IC2.47 IC2.48 IC2.49 IC3.1 IC4.3 J1.2 J1.10 J1.15 J1.25 J1.26 Q2.2 R4.1 R5.1 R6.1 R8.1 R11.1 R12.1 R17.1 R18.1 R20.1 R21.1 SW1.A SW1.A' SW2.A SW2.A' U1.2 U1.3 U1.11 U1.15 U1.THERMAL U2.2 U3.2 X1.1 X1.NC1 X1.NC2 X3.A1B12 X3.B1A12 | length 12621.3
  Top w6: D3.C 205.5,964.25 262.25,964.25 277.99,980 R8.1 330.26,980 359.94,1009.69 443.51,1009.69 462.53,990.67 462.53,969.33 461.78,968.58 461.78,950 ; U1.3 391.94,290.16 U1.THERMAL ; U1.15 391.94,309.84 U1.THERMAL ; U1.11 411.62,309.84 U1.THERMAL ; R5.1 496.07,570.74 SW2.A' ; v1(546.78,545) 535.78,534 SW2.A' ; v1(601.78,152.28) 601.78,187.4 C16.2 582.46,200 542.93,160.47 485.83,160.47 468.27,178.03 366.22,178.03 312.45,124.25 291.11,124.25 265.36,150 201.78,150 201.78,249.52 198.25,253.05 198.25,383.87 C17.2 251.78,430.68 291.31,391.15 291.31,345.54 322.83,314.02 338.55,314.02 U1.2 352.57,300 U1.THERMAL ; C19.2 751.78,400 v1(801.78,350) 868.32,350 R21.1 ; v1(701.78,200) 689.18,212.6 C18.2 800.28,300 v1(801.78,298.5) ; 701.78,605 701.78,549.46 C4.2 ; C1.2 884.78,817 C2.2@890.33,811.45 ; v1(851.78,421.07) 834.37,438.47 C8.2 799.3,512.3 747.95,512.3 718.79,541.46 C4.2 ; v1(851.78,1600) 839.18,1612.6 IC3.1 C14.2 C15.2@901.78,1750 ; C2.2 C2.2@890.33,811.45 ; SW1.A' 917.08,557.5 v1(989.28,557.5) ; v1(901.78,1300) 935.24,1300 R11.1 1185.24,1050 1301.78,1050 1301.78,1007.6 C7.2@1294.18,1000 ; C15.2 C15.2@901.78,1750 ; v1(951.78,1400) v1(951.78,1500) ; R18.1@951.78,2133.46 R18.1 968.32,2095.24 927.8,2054.73 927.8,2020.86 968.32,1980.35 Q2.2 v1(968.32,1883.46) v1(1101.78,1750) 1057.26,1750 981.51,1674.25 941.11,1674.25 926.03,1689.33 926.03,1725.75 C15.2@901.78,1750 ; CONN1.MT1 939.11,860.24 C2.2@890.33,811.45 ; v1(1052.11,600.33) 1052.11,599.67 1086.39,565.39 ; SW1.A 1086.39,565.39 ; CONN1.1 1151.78,637.32 v1(1151.78,600) 1120.99,600 1086.39,565.39 ; C13.2 1118.32,300 IC4.3 1223.83,327.95 v1(1189.91,361.87) ; v1(1151.78,450) 1159.28,457.5 C5.2 R17.1 ; C11.2 1301.78,200 v1(1351.78,250) 1431.47,170.32 1543.62,170.32 1573.3,200 R20.1 ; C7.2 C7.2@1294.18,1000 ; v1(1351.78,694.25) 1351.78,869.9 C9.2 C7.2@1294.18,1000 ; v1(1701.78,800) 1715.95,814.17 IC2.44 IC2.41 IC2.48 1960.05,616.53 2186.58,389.99 2186.58,377.8 IC2.40 ; IC2.42 2021.53,814.17 2186.58,979.23 2186.58,1022.2 IC2.1 2201.78,1051.57 2201.78,1150 2171.58,1150 2157.58,1164 2101.78,1164 2090.24,1175.54 C10.2 ; SW2.A' SW2.A 664.96,541.46 C4.2
  Top w8: IC1.B1 1011.78,955.4 C3.2
  Top w16: X3.B1A12 405.3,624.02 436.78,592.54 R5.1 ; X3.A1B12 407.76,875.98 454.45,922.67 454.45,923.09 456.78,925.42 456.78,945 461.78,950 531.78,950 542.41,939.37 X1.1 ; R12.1 485.08,523 SW2.A' ; C6.2 661.35,605 701.78,605 731.78,605 736.97,610.19 745.92,610.19 763.78,628.05 U2.2 ; R4.1 768.78,887.4 816.68,839.5 C1.2 ; C8.2 869.76,512.63 885.11,512.63 896.07,523.59 SW1.A' ; U3.2 864.78,828.9 C2.2 ; CONN1.MT1 1037.18,899.58 C3.2
  Bottom w6: v1(601.78,152.28) 649.5,200 v1(701.78,200) ; R6.1 755.72,1412.6 C12.2 ; v1(801.78,298.5) v1(801.78,350) 851.78,400 v1(851.78,421.07) ; v1(851.78,1600) 851.78,1569.8 891.31,1530.27 891.31,1458.85 851.78,1419.32 C12.2 ; v1(901.78,1300) 901.78,1337.8 914.18,1350.2 ; v1(951.78,1400) 951.78,1350.2 ; v1(951.78,1500) 1009.82,1500 1041.31,1468.51 1041.31,1452.4 J1.2 ; J1.26 951.78,1350.2 ; v1(989.28,557.5) 1009.28,557.5 v1(1052.11,600.33) ; v1(1189.91,361.87) 1189.91,411.87 v1(1151.78,450) v1(1151.78,600) 1201.78,650 1701.78,650 v1(1701.78,800) 1596.03,694.25 v1(1351.78,694.25) ; J1.10@1198.79,1444.84 J1.10 1202.57,1538.55 1176.03,1565.08 1176.03,1675.75 v1(1101.78,1750) ; IC4.3 1263.41,300 1277.41,286 1315.78,286 v1(1351.78,250) ; J1.15 1300.99,1600.79 1151.78,1750 v1(1101.78,1750) ; J1.25 1589.38,1350.2 1513.65,1425.92 1513.65,1448.92 1212.58,1750 v1(1101.78,1750) ; C12.2 914.18,1350.2 ; 914.18,1350.2 951.78,1350.2
  other v1: 736.78,595 1066.78,650 241.78,670 1001.78,722.5 1011.78,810 1064.28,847.5 236.78,850 1089.28,930 1141.78,1100 1251.78,1120
HREF: IC2.22 J1.9 | length 1128.5
  Top w6: v1(1200.04,1151.74) 1226.03,1125.75 1226.03,1109.33 1271.36,1064 1307.58,1064 1344.28,1027.3 v1(1344.28,950) ; v1(1301.78,800) 1326.03,775.75 1326.03,683.58 1384.61,625 IC2.22
  Bottom w6: J1.9 1182.88,1432.51 1164.37,1414 1164.26,1414 1137.78,1387.52 1137.78,1214 v1(1200.04,1151.74) v1@1201.78,1150 ; v1(1301.78,800) 1344.28,842.5 v1(1344.28,950)
IO47_DBLTAP: C5.1 IC2.24 R17.2 | length 287.8
  Top w6: C5.1 1444.28,457.5 1444.28,471.01 1475.98,502.72 1487.37,502.72 IC2.24
  Top w8: C5.1 R17.2
N$1: CHG.C R2.1 | length 151
  Top w8: CHG.C 277.91,515 330.91,462 R2.1
N$2: LED1.2 R9.1 | length 258.8
  Top w6: R9.1 v1(1651.78,2100)
  Bottom w6: LED1.2 1529.76,2150 1558.46,2178.7 1604.15,2178.7 1610.01,2172.84 1610.01,2141.77 v1(1651.78,2100)
N$3: R2.2 U3.1 | length 966.7
  Top w8: R2.2 454.28,442.46 v1(454.28,415) ; v1(826.78,942.72) 827.38,942.12 U3.1
  Bottom w8: v1(454.28,415) 454.28,642.56 406.78,690.06 406.78,755 436.78,785 506.78,785 664.5,942.72 v1(826.78,942.72)
N$4: R4.2 U3.5 | length 72.2
  Top w8: R4.2 794.66,958.46 U3.5
N$5: D3.A R10.2 | length 171.7
  Top w8: D3.A 266.78,990 348.32,1071.54 R10.2
N$6: Q1.1 R11.2 R66.1 | length 188.7
  Top w6: Q1.1 775.01,1300 801.78,1300 835.24,1266.54 R66.1 R11.2
N$7: IC3.3 Q1.3 | length 155.5
  Top w6: Q1.3 IC3.3
N$8: R8.2 X3.A5 | length 280.4
  Top w8: R8.2 v1(436.78,980) ; X3.A5 420.99,799.21 v1(457.17,835.39)
  Bottom w8: v1(436.78,980) 437.17,979.61 437.17,855.39 v1(457.17,835.39)
N$9: R5.2 X3.B5 | length 86.9
  Top w8: X3.B5 425.68,681.1 447.32,659.46 R5.2
N$10: LED2.2 R13.1 | length 215.3
  Top w6: v1(1501.78,1750) 1518.32,1733.46 R13.1
  Bottom w6: v1(1501.78,1750) 1501.78,1829.53 LED2.2
N$11: LED3.2 R14.1 | length 198
  Top w6: v1(751.78,2150) 818.32,2083.46 R14.1
  Bottom w6: v1(751.78,2150) LED3.2
N$12: LED4.2 R15.1 | length 198
  Top w6: v1(751.78,1850) 751.78,1883.46 R15.1
  Bottom w6: v1(751.78,1850) LED4.2
N$13: LED1.1 LED2.1 LED3.1 LED4.1 Q2.3 | length 1859.5
  Top w6: Q2.3 1051.78,2016.54 v1(1051.78,2050)
  Bottom w6: LED4.1 873.8,1850 845.1,1878.7 773.08,1878.7 751.78,1900 751.78,2100 831.31,2100 LED3.1 ; v1(1051.78,2050) 951.78,2150 LED3.1 ; LED2.1 1581.31,2100 ; LED1.1 1581.31,2100 ; LED3.1 943.31,2212 1439.78,2212 1493.55,2158.23 1493.55,2127.16 1499.41,2121.3 1560.01,2121.3 1581.31,2100
N$14: D1.C D2.C R16.1 | length 451.3
  Top w6: D2.C D1.C 1440.23,2150 1481.47,2108.77 1481.47,2058.16 1451.78,2028.48 R16.1
N$15: Q2.1 R16.2 R18.2 | length 711.7
  Top w6: Q2.1 1035.24,2104.72 R18.2 1051.78,2150 1051.78,2086.42 1077.53,2060.67 1077.53,2024.25 1101.78,2000 1368.32,2000 R16.2
N$17: IC4.6 R19.1 R21.2 | length 750.5
  Top w6: v1(951.78,350) R19.1 1001.78,333.46 R21.2 ; IC4.6 v1(1401.78,300)
  Bottom w6: v1(951.78,350) 1131.84,350 1181.84,300 1181.84,317.39 1206.44,341.99 1241.22,341.99 1283.21,300 v1(1401.78,300)
N$18: FB2.1 U1.10 | length 375.2
  Top w6: FB2.1 364.38,112.6 v1(401.78,150) ; U1.10 465.01,294.33 480.73,294.33 486.39,300 501.78,300 524.56,322.78 v1(524.56,327.22)
  Bottom w6: v1(401.78,150) 437.78,186 437.78,205.8 524.56,292.58 v1(524.56,327.22)
N$19: FB1.1 U1.9 | length 378.8
  Top w6: v1(451.78,152.28) 464.53,139.53 467.73,139.53 507.26,100 FB1.1 ; U1.9 522.25,270.47 v1(551.78,300)
  Bottom w6: v1@451.78,150 v1(451.78,152.28) 451.78,200 v1(551.78,300)
PCLK: IC2.12 J1.17 | length 650.5
  Top w6: v1(1499.76,1197.98) 1597.73,1100 1651.78,1100 1651.78,1051.57 IC2.12
  Bottom w6: 1363.03,1487.4 1344.14,1468.51 1344.14,1452.4 J1.17 1343.38,1445.6 1343.38,1302.18 1385.31,1260.25 1441.53,1260.25 1501.78,1200 v1(1499.76,1197.98)
PWDN: J1.8 R6.2 | length 889
  Bottom w6: R6.2 801.78,1533.46 801.78,1800 888.2,1800 1159.42,1528.78 1159.42,1452.4 J1.8
RESET: C4.1 IC2.3 J1.6 R1.1 SW2.B SW2.B' TP3.P$1 | length 3602.2
  Top w6: v1(1101.78,1500) 1551.78,1500 1551.78,1350 v1(1601.78,1300) ; v1(1651.78,1350) TP3.P$1 ; v1(2091.78,920.84) 2108.87,937.93 IC2.3 2101.78,1051.57 v1(2101.78,1100)
  Top w8: SW2.B' SW2.B 706.25,471 C4.1 769.78,474.54 R1.1 771.78,445 822.46,394.32 1373.41,394.32 v1(1399.1,420)
  Bottom w6: v1(1101.78,1500) 1123.83,1477.95 J1.6 ; v1(1601.78,1300) 1683.4,1300 ; v1(1651.78,1350) 1683.4,1318.38 1683.4,1300 ; v1(2101.78,1100) 2101.78,1287 1696.4,1287 1683.4,1300
  Bottom w8: v1(1399.1,420) 1399.1,433.1 1414.83,448.84 1619.78,448.84 v1(2091.78,920.84)
RX: IC2.31 JP1.4 | length 628.6
  Top w6: 1758.87,307.09 IC2.31 1781.15,377.8 1781.15,389.18 1787.01,395.04 1796.82,395.04 v1(1851.78,450) ; v1(1901.78,150) 1901.78,100 JP1.4
  Bottom w6: v1(1851.78,450) 1901.78,400 v1(1901.78,150)
RXD0: IC2.36 JP1.6 | length 681.2
  Top w6: v1(2001.78,400) 2008.87,392.91 IC2.36
  Bottom w6: v1(2001.78,400) 2015.36,400 2041.11,374.25 2213.53,374.25 2287.78,300 2287.78,257.93 2281.47,251.62 2281.47,179.69 JP1.6
SCL: CONN1.4 IC1.C2 IC2.15 J1.5 R3.1 | length 1323
  Top w6: v1(1001.78,1150) 1037.78,1114 1037.78,1094.2 1063.97,1068.02 1063.97,1032.5 ; 1165.17,1009.09 1169.28,1004.98 v1(1169.28,937.5) ; v1(1451.78,1000) 1484.65,1000 IC2.15 IC2.15@1514.65,980
  Top w8: IC1.C2 1041.47,1010 1063.97,1032.5 1141.76,1032.5 1165.17,1009.09 ; CONN1.4 1166.19,809.06 R3.1 1161.78,837.72 v1(1161.78,855)
  Bottom w6: v1(1001.78,1150) 1104.14,1252.36 J1.5 ; v1(1169.28,937.5) 1169.28,967.5 1201.78,1000 v1(1451.78,1000)
  Bottom w8: v1(1161.78,855) 1161.78,930 v1(1169.28,937.5)
SD_MODE: R22.1 U1.4 | length 98
  Top w6: R22.1 268.71,270.47 U1.4
SDA: CONN1.3 IC1.C1 IC2.4 J1.3 R3.2 | length 2134.7
  Top w6: v1(1051.78,1300) 1051.78,1234.99 v1(1211.02,1075.75) ; v1(2011.78,930) 2058.87,977.09 IC2.4
  Top w8: IC1.C1 1059.6,990.32 1081.78,1012.5 1123.24,1012.5 v1(1131.49,1004.25) ; CONN1.3 1139.75,769.68 1155.82,785.75 R3.2 1209.28,785.75 1209.28,846 v1(1200.28,855)
  Bottom w6: v1(1051.78,1300) 1051.78,1419.52 1060.99,1428.73 1060.99,1444.84 J1.3 ; v1(1211.02,1075.75) 1211.02,1068.76 1251.78,1028 ; 1931.78,1010 v1(2011.78,930)
  Bottom w8: v1(1131.49,1004.25) 1133.99,1004.25 1140.74,997.5 1149.28,997.5 ; v1(1200.28,855) 1200.28,840.67 1187.86,828.25 1148.2,828.25 1135.03,841.42 1135.03,943.58 1149.28,957.83 1149.28,997.5 ; 1931.78,1010 1620.99,1010 1602.99,1028 1251.78,1028 1194.78,1028 1164.28,997.5 1149.28,997.5
SELECT: IC2.34 IC4.2 R20.2 | length 876.9
  Top w6: IC4.2 1286.56,348.56 1286.56,351.39 1296.36,361.18 v1(1401.78,361.18) ; v1(1401.78,250) 1468.32,250 R20.2@1510.05,208.27 ; R20.2 R20.2@1510.05,208.27 ; IC2.34 1886.58,333.23 1886.58,321.84 1814.74,250 1551.78,250 R20.2@1510.05,208.27
  Bottom w6: v1(1401.78,250) 1401.78,263.58 1427.53,289.33 1427.53,310.67 1401.78,336.42 v1(1401.78,361.18)
STROBE: D1.A J1.1 | length 733.5
  Top w6: v1(1001.78,1400) 1001.78,1550 v1(1051.78,1550) ; v1(1001.78,1601.5) 1053.28,1601.5 D1.A
  Bottom w6: v1(1001.78,1400) 1025.4,1423.62 J1.1 ; v1(1001.78,1601.5) 1001.78,1600 v1(1051.78,1550)
TX: IC2.32 JP1.5 | length 669.4
  Top w6: IC2.32@1801.78,348.43 IC2.32 1831.15,377.8 1831.15,389.18 1891.97,450 v1(1951.78,450) ; v1(1951.78,150) 2001.78,150 2001.78,100 JP1.5
  Bottom w6: v1(1951.78,150) v1(1951.78,450)
TXD0: IC2.37 JP1.7 | length 677.1
  Top w6: v1(2051.78,400) 2058.87,392.91 IC2.37
  Bottom w6: v1(2051.78,400) 2301.78,400 2301.78,252.13 ; JP1.7 2295.47,93.69 2295.47,195.82 2301.78,202.13 2301.78,252.13 ; 2295.47,245.82 2301.78,252.13
VBAT: C3.1 IC1.A3 Q3.3 U3.3 X1.2 | length 918.1
  Top w12: Q3.3 603.78,756.37 603.78,852 616.78,865 616.78,912.46 X1.2 ; U3.3 925.84,888.82 956.48,920.23 961.54,920.23 C3.1 962.38,1018.1 973.97,1029.69 IC1.A3
  Top w16: X1.2 621.15,984.37 646.78,1010 784.28,1010 811.78,1037.5 811.78,1035 844.23,1035 858.21,1021.02 858.21,961.05 902.18,917.08 U3.3
VBUS: CHG.A D4.A Q3.1 R12.2 U3.4 X3.A4B9 X3.B4A9 | length 1764.3
  Top w12: CHG.A@179.75,525 199.36,544.61 314.28,544.61 ; R12.2 341.32,523 319.71,544.61 314.28,544.61 ; X3.B4A9 374.04,655.51 359.9,669.66 316.78,669.66 ; Q3.1 530.95,642.2 D4.A 530.95,775.83 499.79,806.99 499.79,896.99 v2(487.29,909.49) 477.29,899.49 476.35,899.49 421.35,844.49 X3.A4B9 374.04,844.49 316.78,787.23 316.78,669.66 ; 314.28,544.61 314.28,566.2 303.37,577.11 303.37,640.91 316.78,654.31 316.78,669.66
  Top w16: CHG.A CHG.A@179.75,525 ; U3.4 902.18,1014.4 v2(926.28,1038.5) 931.78,1044 931.78,1180
  Bottom w16: v2(487.29,909.49) 601.27,909.49 671.78,980 867.78,980 v2(926.28,1038.5)
VHI: C6.1 D4.C Q3.2 R7.2 U2.1 | length 801.9
  Top w12: Q3.2 598.68,654.4 651.48,707.2 C6.1 ; D4.C 661.35,756.74 C6.1 ; 1081.88,506.32 1081.13,506.32 1080.59,505.78 1032.41,505.78 1024.25,513.94 1024.25,587.53 1009.28,602.5 931.78,602.5 920.24,614.04 R7.2 919.78,649.5 879.28,690 736.78,690 726.38,679.6 U2.1 726.38,660.4 679.58,707.2 C6.1
VO+: C19.1 FB1.2 J2.2 | length 785.6
  Top w6: FB1.2 v1(701.78,100) ; C19.1 621.1,400 660.63,439.53 717.73,439.53 731.51,425.75 v1(751.78,425.75) ; v1(751.78,202.44) 764.53,189.69 768.22,189.69 807.9,150 J2.2 850.21,148.43 v1(801.78,100)
  Bottom w6: v1(701.78,100) v1(801.78,100) ; v1(751.78,202.44) v1(751.78,425.75)
VO-: C18.1 FB2.2 J2.1 | length 721.8
  Top w6: FB2.2 446.3,100 533.3,13 701.78,13 751.78,63 J2.1 651.78,150 623.59,178.19 623.59,233.67 614.38,242.88 C18.1
VSYNC: IC2.23 J1.7 | length 2917.2
  Top w6: v1(1101.78,1550) 1601.78,1550 1601.78,1350 1687.78,1264 1757.58,1264 1771.58,1250 1915.36,1250 1946.67,1281.31 2225.1,1281.31 2258.09,1248.32 2258.09,656.31 v1(2251.78,650) ; IC2.23 1576.78,575 v1(1601.78,600) ; v1(1701.78,600) v1(1851.78,600)
  Bottom w6: v1(1101.78,1550) 1143.51,1508.27 J1.7 ; v1(1601.78,600) v1(1701.78,600) ; v1(1851.78,600) 2201.78,600 v1(2251.78,650)
WS: IC2.33 IC4.1 U1.14 | length 3469
  Top w6: v1(401.78,400) 401.78,384.61 407.45,378.95 407.45,363.23 U1.14 ; IC4.1 1501.78,335.43 ; v1(1501.78,50) 1564.53,50 v1(1651.78,137.25) ; v1(1503.26,251.48) 1503.26,333.96 1501.78,335.43 ; IC2.33 1836.58,333.23 1836.58,321.84 1807.83,293.09 1559.91,293.09 1517.56,335.43 1501.78,335.43
  Bottom w6: v1(401.78,400) 351.78,400 301.78,450 201.78,450 201.78,100 251.78,50 v1(1501.78,50) ; v1(1503.26,251.48) 1812.47,251.48 1877.53,186.42 1877.53,165.08 1861.45,149 1663.53,149 v1(1651.78,137.25)
XVCLK: IC2.19 J1.13 | length 787.3
  Top w6: v1(1386.28,1152.91) 1398.03,1141.16 1398.03,875.24 1475.98,797.28 1487.37,797.28 IC2.19
  Bottom w6: J1.13 1261.62,1270.36 1349.98,1182 1357.19,1182 v1(1386.28,1152.91)
pads on no net: IC1.A2 IC1.B2 IC1.B3 IC1.C3 IC2.16 IC2.26 IC2.28 IC2.29 IC2.30 JP1.1 JP1.2 JP1.3 R3.3 R3.4 R3.5 R3.6 U1.5 U1.6 U1.12 U1.13 U2.4 U$34.1 U$35.1 X3.A8 X3.B8 X3.M1 X3.M2 X3.M3 X3.M4

## Keep-outs
Keep-Out Layer:
  the board outline again, w0

## Other copper
Bottom:
  drawing of 18 lines, arcs and shapes, not listed

## Silkscreen, mask and mechanical layers (free items; w line width, h text height)
Dimension:
  the board outline again, w0
tPlace:
  text "SDA" at 1976.14,1115.48 h27.2 r90
  text "SCL" at 1752.38,1068.93 h34
  text "#13" at 323.37,1012.09 h34
  text "I2C" at 958.27,722.53 h34 r90
  text "ESP32S3" at 1315.35,662.62 h34 r90
  text "Boot" at 916.71,582.09 h34
  text "Reset" at 519.71,577.09 h34
  text "Neo" at 1239.88,543.93 h34
  text "Chg" at 262.6,515.99 h32.3
Unrouted:
  lines w0: 179.75,990 236.78,850 241.78,670 396.35,624.02 ; 318.32,980 447.92,1121.56 ; 715.64,1121.56 768.78,891.54 ; 736.78,595 763.78,648.82 ; 992.1,990.32 1011.78,990.32 ; 997.84,860.24 1011.78,810 ; 1037.18,930 1089.28,930 ; 1037.49,473.5 1057.49,473.5 ; 1052.11,600.33 997.84,639.76 1001.78,722.5 1011.78,810 ; 1064.28,847.5 1011.78,810 ; 1066.78,650 1098.16,690.94 ; 1141.78,1100 1251.78,1120 1294.18,1002.5 ; 1849.81,703.94 1849.81,759.06 1904.93,759.06 1904.93,814.17 1960.05,814.17 1960.05,759.06 ; 1904.93,703.94 1960.05,703.94

## Dimensions
301.78,300 to 326.78,750 on tFinish
151.78,1105 to 576.78,1060 on tFinish
151.78,1115 to 1351.78,1150 on tFinish
151.78,565 to 1151.78,350 on tFinish
2006.78,370 to 2096.78,375 on tFinish
201.78,400 to 301.78,400 on tFinish
251.78,1100 to 2051.78,1125 on tFinish
151.78,920 to 2151.78,500 on tFinish
2051.78,375 to 2051.78,1125 on tFinish
961.78,300 to 1101.78,1200 on tFinish